# EAGLE board NodeRelay.v1.cg2 (EAGLE 4.11)
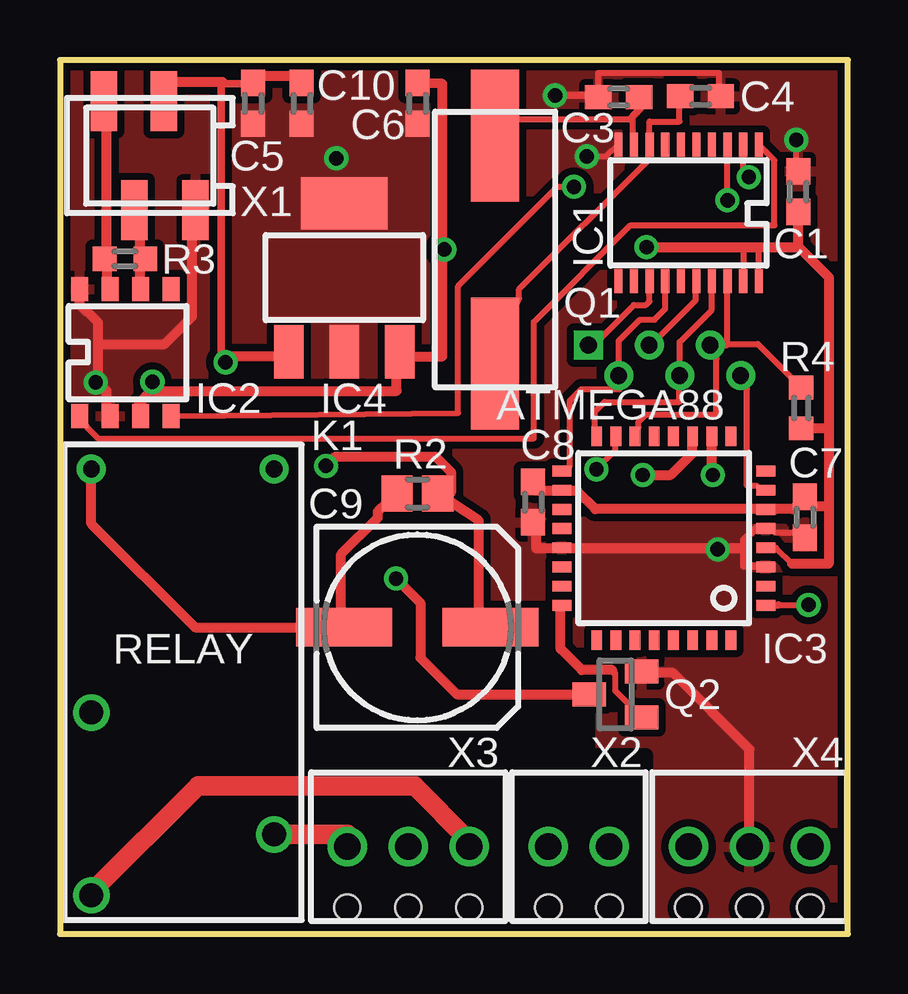
[diagram p0: board, top side]
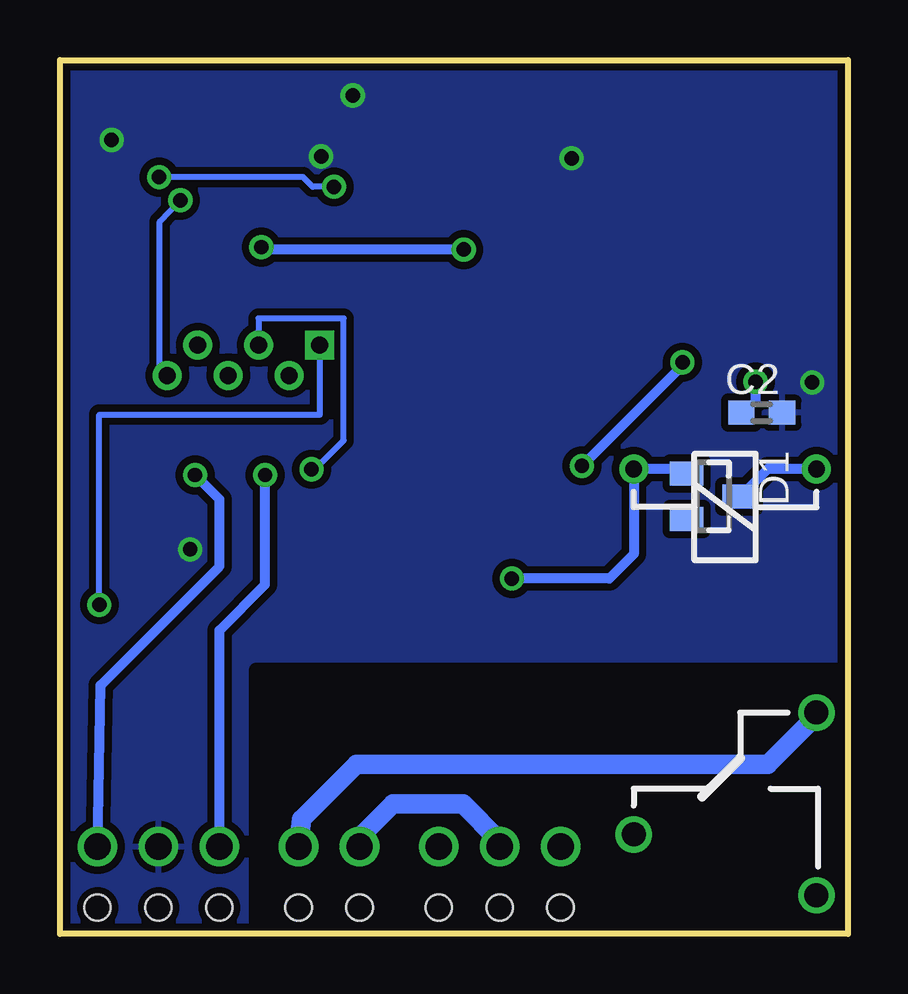
[diagram p1: board, bottom side, seen from below]

Size 32.85 x 36.43 mm. Coordinates in mm from the lower left corner, seen from the top.
Outline: 0,0 32.85,0 32.85,36.43 0,36.43 0,0
Copper layers (1*16): Top 0.035mm / dielectric 1.5mm / Bottom 0.035mm
Design rules "10mils, 0.6drill": minimum track width 10mil, minimum drill 0.6mm, track to track 10mil, track to pad 10mil, pad to pad 10mil, via to via 10mil, smd to smd 10mil, copper to edge 10mil, drill to drill 10mil, minimum pad ring 10mil, minimum via ring 8mil, stop-mask expansion 0mil, vias tented up to drill 0mil, thermal gap 10mil
tRestrict: area -0.5,-0.9 to 10.5,11; area 10.5,-0.9 to 24.4,7.4; area 10.5,7.4 to 22,8.8; area 10.5,8.7 to 15.4,10.2
bRestrict: area -0.5,-0.9 to 24.7,11

## Footprints (pad centres in the part's own frame; a part is rotated, then mirrored left to right if it is on the bottom)
C0603 = smd 1.1 x 1: 1 -0.85,0; 2 0.85,0
153CLV-0807 = smd 4 x 1.6: + 3.05,0; - -3.05,0
SOT23 = smd 1 x 1.4: 1 -0.95,-1.1; 2 0.95,-1.1; 3 0,1.1
TSSOP = smd 0.34 x 1: 1 -2.925,-2.85; 2 -2.275,-2.85; 3 -1.625,-2.85; 4 -0.975,-2.85; 5 -0.325,-2.85; 6 0.325,-2.85; 7 0.975,-2.85; 8 1.625,-2.85; 9 2.275,-2.85; 10 2.925,-2.85; 11 2.925,2.85; 12 2.275,2.85; 13 1.625,2.85; 14 0.975,2.85; 15 0.325,2.85; 16 -0.325,2.85; 17 -0.975,2.85; 18 -1.625,2.85; 19 -2.275,2.85; 20 -2.925,2.85
TSSOP' = smd 0.7 x 1: 1 -1.981,-2.645; 2 -0.711,-2.645; 3 0.559,-2.645; 4 1.829,-2.645; 5 1.829,2.645; 6 0.559,2.645; 7 -0.711,2.645; 8 -1.981,2.645
TQFP32 = smd 0.8 x 0.45: 1 -4.25,2.65; 2 -4.25,1.85; 3 -4.25,1.05; 4 -4.25,0.25; 5 -4.25,-0.55; 6 -4.25,-1.35; 7 -4.25,-2.15; 8 -4.25,-2.95; 17 4.25,-2.95; 18 4.25,-2.15; 19 4.25,-1.35; 20 4.25,-0.55; 21 4.25,0.25; 22 4.25,1.05; 23 4.25,1.85; 24 4.25,2.65 | smd 0.45 x 0.8: 9 -2.8,-4.4; 10 -2,-4.4; 11 -1.2,-4.4; 12 -0.4,-4.4; 13 0.4,-4.4; 14 1.2,-4.4; 15 2,-4.4; 16 2.8,-4.4; 25 2.8,4.1; 26 2,4.1; 27 1.2,4.1; 28 0.4,4.1; 29 -0.4,4.1; 30 -1.2,4.1; 31 -2,4.1; 32 -2.8,4.1
SOT223 = smd 1.219 x 2.235: 1 -2.311,-3.099; 2 0,-3.099; 3 2.311,-3.099 | smd 3.6 x 2.2: 4 0,3.099
TYCO-PCH = drill 0.7 round: 1 -8.89,-3.81; 2 -8.89,3.81 | drill 1 round: O 6.35,3.81; P 1.27,-3.81; S 8.89,-3.81
SMD = smd 5.5 x 2: P$1 4.75,0; P$2 -4.75,0
R0805 = smd 1.3 x 1.5: 1 -0.85,0; 2 0.85,0
R0603 = smd 0.991 x 1.016: 1 -0.85,0; 2 0.85,0
VIA-LIST = drill 0.7 square: 1 0,2.54 | drill 0.7 round: 2 -1.27,1.27; 3 0,0; 4 -1.27,-1.27; 5 0,-2.54; 6 -1.27,-3.81
MICROMATCH-4-SMD = smd 1.1 x 2.5: 1 1.905,-2.272; 2 0.585,2.272; 3 -0.635,-2.272; 4 -1.905,2.272
PCB2 = drill 1.1 round: 1 -2.54,0; 2 0,0 | hole 1.1: -2.54,2.54; 0,2.54
PCB3 = drill 1.1 round: 1 -2.54,0; 2 0,0; 3 2.54,0 | hole 1.1: -2.54,2.54; 0,2.54; 2.54,2.54

## Placement (x,y rotation side)
C1  100n  [C0603]  30.78,30.94 90 top
C2  100n  [C0603]  3.59,21.73 0 bottom
C3  16p  [C0603]  23.29,34.88 180 top
C4  16p  [C0603]  26.7,34.91 0 top
C5  0.22µ  [C0603]  8.04,34.62 270 top
C6  100n  [C0603]  14.9,34.62 270 top
C7  100n  [C0603]  31.04,17.36 270 top
C8  100n  [C0603]  19.72,18 270 top
C9  [153CLV-0807]  14.9,12.78 0 top
C10  10n/200V  [C0603]  10.07,34.62 270 top
D1  DIODE  [SOT23]  5.63,18.24 270 bottom
IC1  MCP2515  [TSSOP]  26.21,30.05 180 top
IC2  MCP2551  [TSSOP']  2.8,24.23 0 top
IC3  ATMEGA88  [TQFP32]  25.17,16.35 180 top
IC4  LM340MP-5.0  [SOT223]  11.86,27.35 0 top
K1  RELAY  [TYCO-PCH]  5.12,10.49 270 top
Q1  16/20MHz  [SMD]  18.14,28.53 270 top
Q2  BSS123  [SOT23]  23.16,9.98 90 top
R2  [R0805]  14.9,18.36 0 top
R3  [R0603]  2.71,28.14 0 top
R4  10k  [R0603]  30.9,21.92 90 top
U$1  CAN-INTERFACE  [VIA-LIST]  24.57,24.55 90 top
X1  MICROMATCH-4  [MICROMATCH-4-SMD]  3.75,32.44 0 top
X2  BLOCK2  [PCB2]  20.36,3.63 180 top
X3  BLOCK3  [PCB3]  14.52,3.63 180 top
X4  BLOCK3  [PCB3]  28.74,3.63 180 top

## Library data of the parts
C1-C10 R2-R4 = rcl
D1 = diode
IC1 = mcp2515
IC2 = mcp2551
IC3 = atmega88
IC4 = lm340mp
K1 = relay
Q1 = hc49-4h-smx
Q2 = transistor
U$1 = can-interface
X1 = micromatch-smd
X2-X4 = terminal_block

## Nets
CANH: IC2.7 R3.1 X1.4
CLK: IC1.3 IC3.7 U$1.6
CS: IC1.18 IC3.14 R4.2 U$1.5
GND: C1.2 C2.2 C3.2 C4.2 C5.2 C6.2 C7.2 C8.2 C10.2 IC1.10 IC2.2 IC2.8 IC3.3 IC3.5 IC3.21 IC4.2 IC4.4 Q2.2 X1.1 X4.2
INT: IC1.13 IC3.1 U$1.1
MISO: IC1.17 IC3.16 U$1.4
MOSI: IC1.16 IC3.15 U$1.3
N$1: IC1.2 IC2.4
N$2: IC1.1 IC2.1
N$3: X2.2 X3.2
N$5: K1.P X2.1
N$6: K1.S X3.1
N$7: K1.O X3.3
N$8: C9.- D1.3 K1.1 R2.1
N$9: D1.1 K1.2 Q2.3
N$11: IC3.11 X4.3
N$12: C3.1 IC1.9 Q1.P$2
N$13: C4.1 IC1.8 Q1.P$1
N$14: IC3.24 Q2.1
N$15: IC3.10 X4.1
N$16: IC2.6 R3.2 X1.3
SCK: IC1.14 IC3.17 U$1.2
VCC: C1.1 C2.1 C6.1 C7.1 C8.1 IC1.19 IC1.20 IC2.3 IC3.4 IC3.6 IC3.18 IC4.3 R4.1
VCC_ARNE: C5.1 C9.+ C10.1 IC4.1 R2.2 X1.2

## Tracks (layer width: path | path; a pad name or v marks a point on that pad's centre or on a via)
CANH
  Top 0.254: R3.1 1.95,28.14 1.95,28.02 1.95,26.89 2.07,26.89
  Top 0.406: X1.4 1.95,34.09 1.95,28.02 1.95,27.13 2.07,27 2.07,26.89 IC2.7
CLK  (via drill 0.6)
  Top 0.254: v27.83,30.58 27.83,32.41 IC1.3 | IC3.7 29.05,18.67 28.64,18.67 28.64,22.71 U$1.6
  Bottom 0.254: v27.83,30.58 28.69,29.69 28.69,23.6 U$1.6
CS
  Top 0.254: IC1.18 27.83,24.59 | 27.83,24.59 27.83,24.55 U$1.5 27.37,23.98 27.37,21.64 24.43,21.64 24.12,21.34 24.12,21.11 IC3.14 | R4.2 29.09,24.59 27.83,24.59
GND  (via drill 0.6)
  Top 0.254: v21.96,32.41 22.77,32.41 IC1.10 | v30.7,33.1 30.7,32.23 C1.2 | 1.59,22.99 v1.49,22.99 | 20.62,16.08 IC3.21 21.28,16.08 | 29.05,15.34 IC3.3 | 29.05,16.94 IC3.5 29.81,16.74 30.57,16.74 C7.2 | 27.27,16.08 v27.42,16.03 | C3.2 22.44,35.89 27.47,35.89 27.47,34.88 27.55,34.88 | 27.55,34.88 27.6,34.88 | 27.55,34.88 C4.2
  Top 0.305: IC2.2 1.95,22.02 | C3.2 22.15,34.95 v20.64,34.95 | 29.05,15.34 28.51,15.34 28.51,16.08 28.51,16.41 29.05,16.94
  Top 0.406: 1.95,22.02 1.95,22.63 1.59,22.99 1.59,24.59 | 1.59,24.59 1.59,25.48 0.83,26.24 IC2.8 | 20.62,16.08 19.85,16.08 19.85,17.02 C8.2 | 21.28,16.08 27.27,16.08 28.51,16.08 | X4.2 28.74,7.7 25.57,10.87 24.3,10.87 24.3,10.89 Q2.2 | X1.1 5.5,29.29 5.5,25.73 4.36,24.59 1.59,24.59
  Bottom 0.305: v20.64,34.95 20.59,35.03
  other vias: 11.52,32.33
  pour Bottom (isolate 0.305): -0.01,36.45 32.83,36.45 32.83,-0.03 24.38,-0.03 -0.01,-0.03
  pour Top (isolate 0.305, no thermals): 6.95,35.83 15.89,35.83 15.89,23.41 6.95,23.41
  pour Top (isolate 0.305): -0.21,36.65 33.06,36.65 33.06,-0.18 -0.21,-0.18
INT  (via drill 0.6)
  Top 0.254: U$1.1 22.25,24.55 23.92,26.21 24.43,26.21 24.58,26.37 24.58,27.08 IC1.13 | 29.94,13.72 v31.21,13.72
  Top 0.305: IC3.1 29.94,13.72
  Bottom 0.254: v31.21,13.72 31.21,21.64 22.01,21.64 22.01,24.46 22.02,24.47 U$1.1
MISO
  Top 0.254: IC1.17 27.18,27.14 27.17,27.13 27.17,26.01 25.84,24.68 U$1.4 25.84,23.2 25.82,22.18 22.7,22.18 22.29,21.77 22.29,21.06 IC3.16
MOSI  (via drill 0.6)
  Top 0.254: U$1.3 24.64,24.55 26.51,26.42 26.51,27.18 IC1.16 | v22.36,19.37 23.16,20.14 IC3.15
  Bottom 0.254: v22.36,19.37 22.34,19.25 21.02,20.57 21.02,25.66 24.58,25.66 24.58,25.15 U$1.3
N$1  (via drill 0.6)
  Top 0.254: v21.43,31.14 20.74,31.14 16.6,27 16.6,21.72 4.94,21.59 IC2.4 | v28.72,31.55 28.49,31.78 IC1.2
  Bottom 0.254: v21.43,31.14 22.32,31.14 22.72,31.55 v28.72,31.55
N$2
  Top 0.254: IC2.1 1.13,21.11 1.59,20.65 19.75,20.65 19.75,25.5 23.79,29.54 29.79,29.54 29.79,32.25 IC1.1
N$3
  Bottom 0.813: X3.2 14.52,3.89 16.04,5.41 18.96,5.41 20.23,4.14 X2.2
N$5
  Bottom 0.813: X2.1 22.77,4.78 20.49,7.06 3.34,7.06 1.31,9.09 K1.P
N$6
  Top 0.813: X3.1 17.06,3.89 14.77,6.17 5.76,6.17 1.31,1.73 K1.S
N$7
  Top 0.813: K1.O 11.98,4.14 X3.3
N$8
  Top 0.406: K1.1 1.31,17.1 5.63,12.78 C9.- 11.73,12.4 11.73,15.82 13.25,17.35 13.25,17.6 R2.1
  Bottom 0.406: D1.3 4.49,18.24 3.34,19.38 K1.1
N$9  (via drill 0.6)
  Top 0.406: v14.01,14.81 15.03,13.79 15.03,11.51 16.55,9.98 Q2.3
  Bottom 0.406: v14.01,14.81 9.95,14.81 8.93,15.82 K1.2 6.92,19.38 D1.1
N$11  (via drill 0.6)
  Top 0.406: v24.3,19.13 25.47,19.13 26.36,20.02 26.36,20.63 26.37,20.64 IC3.11
  Bottom 0.406: X4.3 26.2,12.65 24.3,14.56 v24.3,19.13
N$12
  Top 0.254: IC1.9 23.87,33.38 23.87,33.96 23.79,33.96 19.14,33.96 Q1.P$2
  Top 0.305: C3.1 24.17,34.4 23.79,33.96
N$13
  Top 0.254: Q1.P$1 19.14,26.49 19.14,26.87 24.53,32.26 24.53,32.41 IC1.8 24.58,33.86 25.82,33.86 25.82,34.88 25.85,34.88 | 25.85,34.88 25.95,34.88 | 25.85,34.88 C4.1
N$14
  Top 0.254: Q2.1 23.16,10.13 23.16,10.87 23.03,11
  Top 0.406: IC3.24 20.87,13.64 20.87,11.89 | 20.87,11.89 20.87,11.86 | 23.03,11 21.76,11 20.87,11.89
N$15  (via drill 0.6)
  Top 0.406: IC3.10 27.17,19.18 v27.22,19.13
  Bottom 0.406: X4.1 31.16,10.36 26.2,15.32 26.2,18.11 v27.22,19.13
N$16
  Top 0.254: 3.34,28.02 3.34,28.14 R3.2
  Top 0.406: IC2.6 3.34,26.87 3.34,28.02 3.34,29.29 X1.3
SCK
  Top 0.254: IC1.14 25.23,27.17 25.19,27.13 25.24,27.08 25.24,26.06 24.78,25.6 24.17,25.6 23.29,24.73 U$1.2 23.29,23.2 23.31,22.71 21.73,22.71 21.25,22.23 21.25,19.48 IC3.17
VCC  (via drill 0.6)
  Top 0.254: 3.73,22.56 3.78,22.63 | 29.81,17.71 IC3.6 29.05,17.71 | 21.28,18.47 IC3.18 | IC3.4 29.85,16.1 30.52,15.42 | IC1.20 29.12,28.63 29.68,28.63 | IC1.19 28.48,27.14 28.49,27.13 28.49,28.63 28.49,28.65
  Top 0.305: 14.04,23.39 IC4.3
  Top 0.406: C6.1 15.95,35.44 15.95,28.53 | 15.95,28.53 15.95,24.07 14.08,24.07 14.08,24.51 IC4.3 | 3.78,22.63 14.04,22.63 14.04,23.39 | IC2.3 3.29,22.07 3.73,22.56 v3.85,23.01 | 15.95,28.53 v16.02,28.53 | v24.45,28.63 28.49,28.63 29.68,28.63 | 29.68,28.63 29.68,28.62 | IC3.18 20.56,18.47 19.8,18.47 C8.1 | 30.52,15.42 32.05,15.42 32.05,17.81 | 32.05,17.81 31.41,17.81 C7.1 30.57,17.71 29.81,17.71 | 21.28,18.47 21.56,18.47 22.32,17.71 29.05,17.71 | 32.05,21.03 32.05,17.81 | R4.1 32.05,21.07 32.05,21.03 | 29.68,28.63 30.78,28.63 30.78,28.65 | 30.78,28.65 C1.1 | 32.05,21.03 32.05,27.38 30.78,28.65
  Bottom 0.254: 3.85,22.23 C2.1
  Bottom 0.406: v3.85,23.01 3.85,22.23 | v24.45,28.63 24.4,28.63 24.3,28.53 v16.02,28.53
VCC_ARNE  (via drill 0.6)
  Top 0.305: C5.1 7.97,35.43 6.72,35.43 6.72,24.13 6.8,24.06 9.3,24.06 IC4.1
  Top 0.406: 17.44,12.42 C9.+ | 17.44,12.42 17.31,12.43 | 9.3,24.06 9.44,23.95 9.19,24.08 6.9,24.08 v6.9,23.83 | v11.09,19.51 11.47,19.89 15.66,19.89 16.3,19.25 16.3,18.39 R2.2 17.44,17.25 17.44,12.43 17.44,12.42 | C10.1 10.07,35.76 8.17,35.76 8.17,35.47 C5.1 8.04,35.51 | 6.72,35.43 6.77,35.51 4.37,35.51 X1.2
  Bottom 0.406: v11.09,19.51 7.03,23.57 v6.9,23.83

## Text on the board
tDocu: OUT | IN | BTN